# Altium PCB DS135-1.1-A浊度传感器.PcbDoc
Units mm, origin at the board's own origin, x right, y up, seen from the top; angles counter-clockwise.
Board outline 42 x 93 mm, 2 copper layers (Top Layer, Bottom Layer), stack 1.581 mm thick; 48 components, 48 nets, 195 pads, 53 vias.
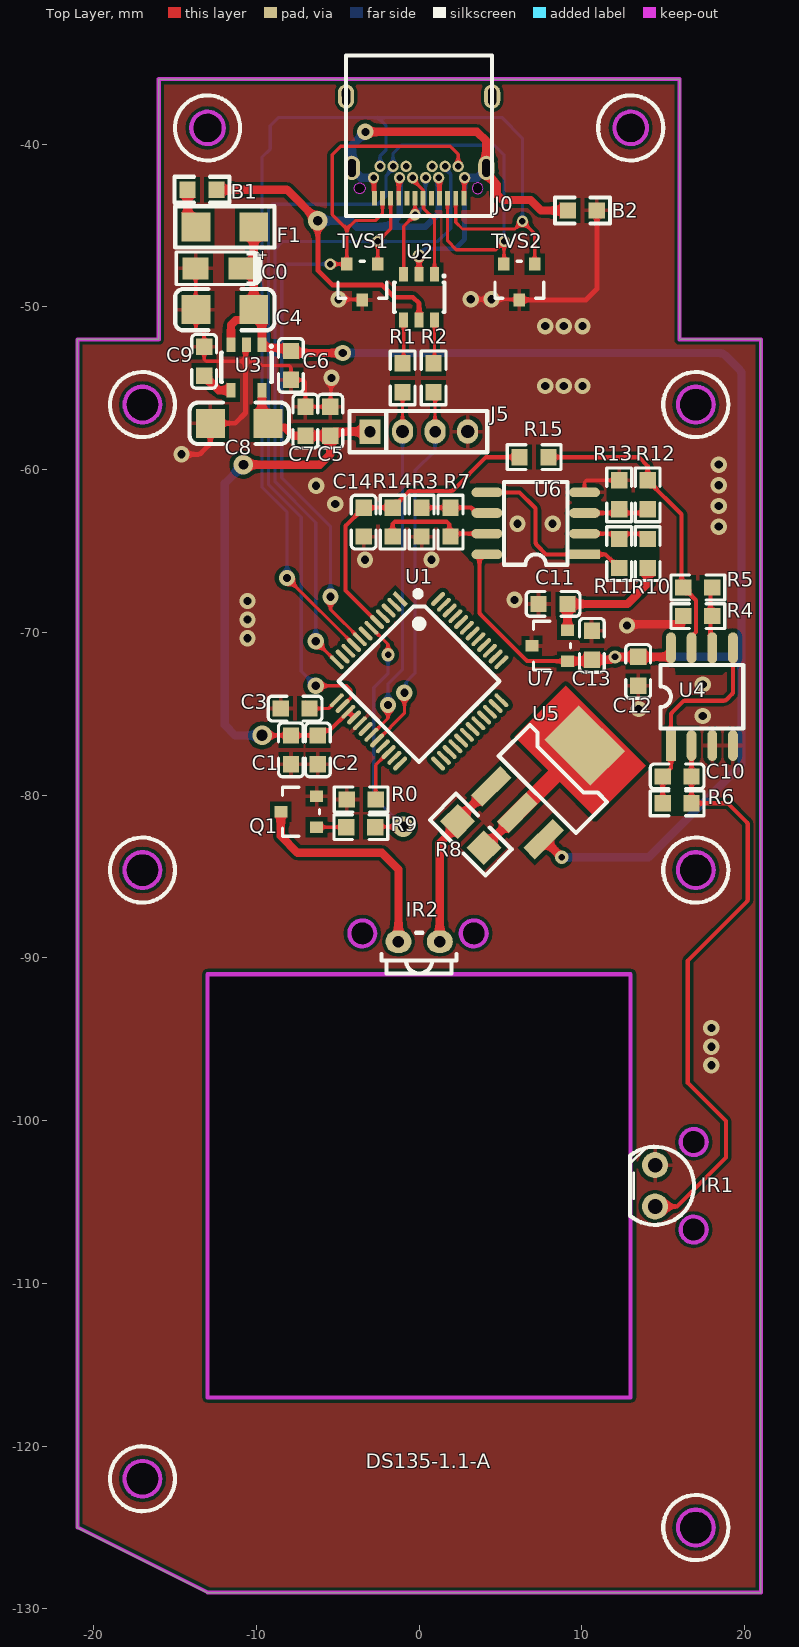
[diagram p0: Top Layer view]
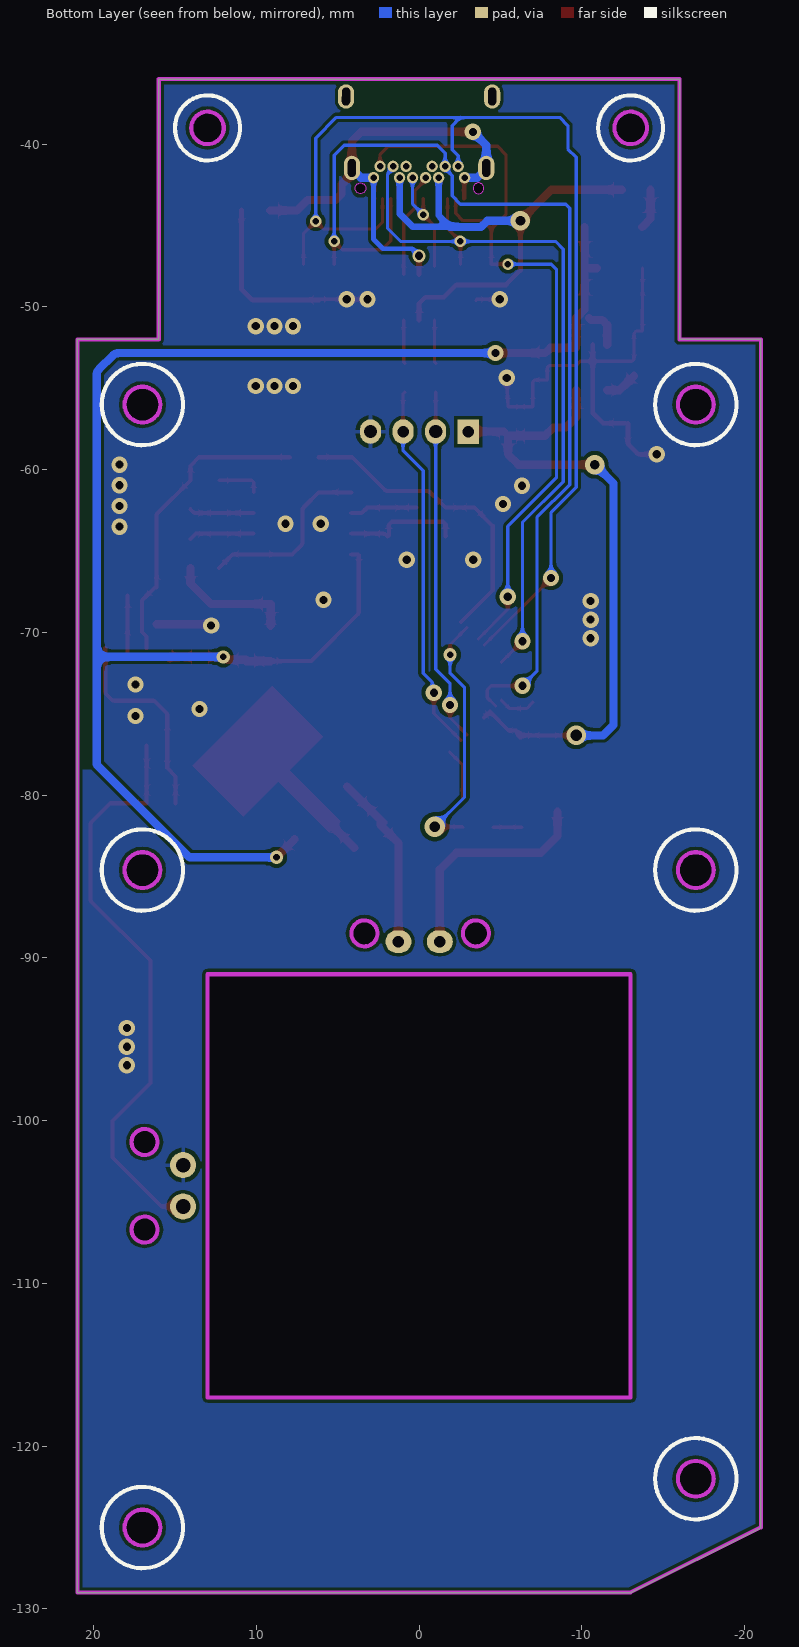
[diagram p1: Bottom Layer view, seen from below]
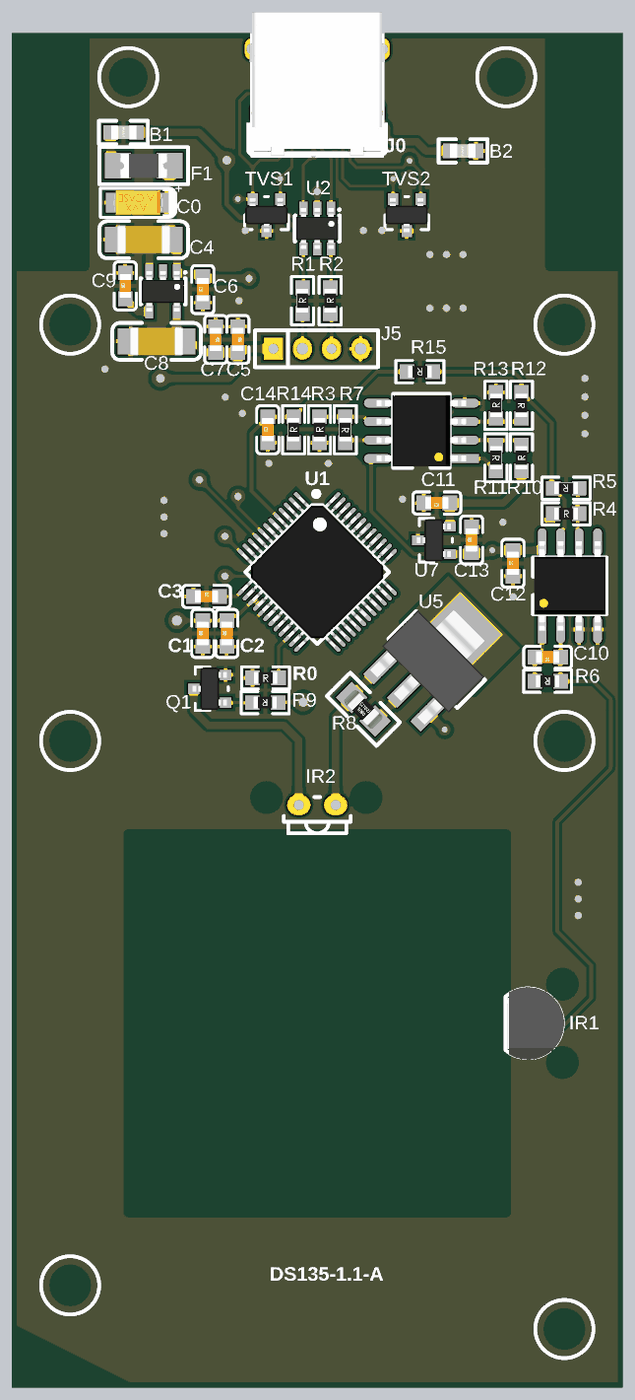
[diagram p2: 3D render of the assembled board from above, using the file's embedded part models]

## Layer stack, top to bottom
Top Solder: solder mask 0.0102, Solder Resist, Dk 3.5
Top Layer: signal copper 0.0356
Dielectric 1: dielectric 1.51, FR-4, Dk 4.8
Bottom Layer: signal copper 0.0356
Bottom Solder: solder mask 0.0102, Solder Resist, Dk 3.5

## Board outline
-21,-125 -13,-129 21,-129 21,-52 16,-52 16,-36 -16,-36 -16,-52 -21,-52
cut-out: 16.07,-101.31 ccw(c16.87,-101.31) 16.87,-102.11 ccw(c16.87,-101.31) 17.67,-101.31 ccw(c16.87,-101.31) 16.87,-100.51 ccw(c16.87,-101.31)
cut-out: 16.07,-106.69 cw(c16.87,-106.69) 16.87,-105.89 cw(c16.87,-106.69) 17.67,-106.69 cw(c16.87,-106.69) 16.87,-107.49 cw(c16.87,-106.69)
cut-out: 2.56,-88.49 ccw(c3.36,-88.49) 3.36,-89.29 ccw(c3.36,-88.49) 4.16,-88.49 ccw(c3.36,-88.49) 3.36,-87.69 ccw(c3.36,-88.49)
cut-out: -4.29,-88.49 ccw(c-3.49,-88.49) -3.49,-89.29 ccw(c-3.49,-88.49) -2.69,-88.49 ccw(c-3.49,-88.49) -3.49,-87.69 ccw(c-3.49,-88.49)
cut-out: 15.9,-84.6 ccw(c17,-84.6) 17,-85.7 ccw(c17,-84.6) 18.1,-84.6 ccw(c17,-84.6) 17,-83.5 ccw(c17,-84.6)
cut-out: 12,-39 ccw(c13,-39) 13,-40 ccw(c13,-39) 14,-39 ccw(c13,-39) 13,-38 ccw(c13,-39)
cut-out: -13,-40 ccw(c-13,-39) -12,-39 ccw(c-13,-39) -13,-38 ccw(c-13,-39) -14,-39 ccw(c-13,-39)
cut-out: -18.1,-122 ccw(c-17,-122) -17,-123.1 ccw(c-17,-122) -15.9,-122 ccw(c-17,-122) -17,-120.9 ccw(c-17,-122)
cut-out: 15.9,-125 ccw(c17,-125) 17,-126.1 ccw(c17,-125) 18.1,-125 ccw(c17,-125) 17,-123.9 ccw(c17,-125)
cut-out: -18.1,-84.6 ccw(c-17,-84.6) -17,-85.7 ccw(c-17,-84.6) -15.9,-84.6 ccw(c-17,-84.6) -17,-83.5 ccw(c-17,-84.6)
cut-out: 18.1,-56 ccw(c17,-56) 17,-54.9 ccw(c17,-56) 15.9,-56 ccw(c17,-56) 17,-57.1 ccw(c17,-56)
cut-out: -18.1,-56 cw(c-17,-56) -17,-54.9 cw(c-17,-56) -15.9,-56 cw(c-17,-56) -17,-57.1 cw(c-17,-56)
cut-out: -13,-117 -13,-91 13,-91 13,-117

## Design rules (kind name [scope] priority, off if disabled: settings)
Clearance [All] p1: gap=0.254 ignorepadtopadclearanceinfootprint=TRUE except(0: Arc-Hole Track-Hole SMDPad-Hole THPad-Hole Via-Hole Fill-Hole Poly-Hole Region-Hole Text-Hole; 0.12: THPad-THPad; 0.15: Arc-SMDPad Arc-THPad Track-SMDPad Track-THPad SMDPad-SMDPad; 0.2: Arc-Arc Arc-Track Arc-Via Arc-Fill Arc-Poly Arc-Region Arc-Text Track-Track Track-Via Track-Fill Track-Poly Track-Region Track-Text SMDPad-THPad SMDPad-Text THPad-Fill THPad-Poly THPad-Region)
MinimumSolderMaskSliver [All] p1: minsoldermaskwidth=0.102
PolygonConnect GND [All] p1: thpad.connectstyle=Relief thpad.reliefconductorwidth=0.254 thpad.reliefentries=4 thpad.polygonreliefangle="90 Angle" thpad.airgapwidth=0.254 smdpad.connectstyle=Relief smdpad.reliefconductorwidth=0.254 smdpad.reliefentries=4 smdpad.polygonreliefangle="90 Angle" smdpad.airgapwidth=0.254 via.connectstyle=Direct via.reliefconductorwidth=0.254 via.reliefentries=4 via.polygonreliefangle="90 Angle" via.airgapwidth=0.254
PolygonConnect VSS [InNet('VSS') vs InNet('VSS')] p2: thpad.connectstyle=Relief thpad.reliefconductorwidth=0.508 thpad.reliefentries=4 thpad.polygonreliefangle="90 Angle" thpad.airgapwidth=0.254 smdpad.connectstyle=Relief smdpad.reliefconductorwidth=0.508 smdpad.reliefentries=4 smdpad.polygonreliefangle="90 Angle" smdpad.airgapwidth=0.254 via.connectstyle=Direct via.reliefconductorwidth=0.508 via.reliefentries=4 via.polygonreliefangle="90 Angle" via.airgapwidth=0.254
RoutingVias [All] p1: holewidth=0.6 width=1 viastyle="Through Hole" minholewidth=0.4 minwidth=0.8 maxholewidth=1 maxwidth=2
SilkToSilkClearance [All] p1: silktosilkclearance=0.025
SilkToSolderMaskClearance [IsPad] p1: minsilkscreentomaskgap=0.025 clearancetoexposedcopper=TRUE
SolderMaskExpansion [All] p1: expansion=0.102 istentingtop=FALSE
Width [All] p1: maxlimit=1 minlimit=0.2 preferedwidth=0.2
27 further rules are at their usual default settings.

## Classes and differential pairs
net class R15_Nets: ADC0 SIG
net class U7_Nets: 2V5 GND VCC_5V
net class U6_Nets: GND NetR3_2 NetR7_2 NetR10_2 NetR11_2 NetR12_2 VCC_5V
net class R14_Nets: ADC0 NetR7_2 NetR14_1
net class R13_Nets: GND NetR12_2
net class R12_Nets: NetR12_2 SIG
net class R11_Nets: NetR10_2 NetR11_2
net class R10_Nets: 2V5 NetR10_2
net class R3_Nets: GND NetR3_2
net class C13_Nets: GND VCC_5V
net class C11_Nets: 2V5 GND
net class C12_Nets: GND VCC_5V
net class U3_Nets: GND NetC9_1 VCC_3V3_MCU VCC_5V
net class C10_Nets: NetC10_1 NetC10_2
net class C0_Nets: GND VCC_5V
net class R8_Nets: NetIR2_1 NetR8_1
net class U1_Nets: ADC0 ADC1 DAC_OUT Dis1_red_EN Dis2_green_EN Dis3_blue_EN GND I2C1_SCL I2C1_SDA KEY_HOME NetU4_1 NetU4_2 NetU4_3 NetU4_4 NetU4_7 NetU4_11 NetU4_23 NetU4_24 NetU4_25 NetU4_26 NetU4_30 NetU4_32 NetU4_39 NetU4_40 NetU4_41 NetU4_42 NetU4_43 NetU4_44 NetU4_45 NetU4_46 NetU4_47 NetU4_48 P3.0/D-/RxD P3.1/D+/TxD P3.3 PWM SPI1/SPI2_CS SPI1_MISO SPI1_MOSI SPI1_SCK SPI2_MISO SPI2_MOSI SPI2_SCK UCAP USART2_RXD USART2_TXD VCC_3V3_MCU
net class U4_Nets: GND NetC10_1 NetC10_2 NetR4_2 SIG VCC_5V
net class J5_Nets: GND P3.0/D-/RxD P3.1/D+/TxD VCC_3V3_MCU
net class C8_Nets: GND VCC_3V3_MCU
net class C2_Nets: GND VCC_3V3_MCU
net class R9_Nets: ADC1 NetQ1_1
net class R7_Nets: NetR3_2 NetR7_2
net class IR2_Nets: NetIR2_1 NetIR2_2
net class IR1_Nets: GND NetC10_1
net class TVS2_Nets: GND SPI1/SPI2_CS SPI1_SCK
net class J0_Nets: D+_I/O1 D-_I/O2 NetJ0_A5 NetJ0_A8 NetJ0_B5 NetJ0_B8 SPI1/SPI2_CS SPI1_MISO SPI1_MOSI SPI1_SCK VBUS VSS
net class F1_Nets: NetB1_2 VCC_5V
net class C7_Nets: GND VCC_3V3_MCU
net class C4_Nets: GND VCC_5V
net class B2_Nets: GND VSS
net class B1_Nets: NetB1_2 VBUS
net class U5_Nets: NetIR2_1 NetR8_1 VCC_5V
net class R4_Nets: GND NetR4_2
net class R6_Nets: NetC10_1 NetC10_2
net class R2_Nets: P3.1/D+/TxD USB_D+
net class R1_Nets: P3.0/D-/RxD USB_D-
net class R5_Nets: NetR4_2 SIG
net class R0_Nets: GND P3.3
net class Q1_Nets: GND NetIR2_2 NetQ1_1
net class U2_Nets: D+_I/O1 D-_I/O2 USB_D+ USB_D- VBUS VSS
net class TVS1_Nets: GND SPI1_MISO SPI1_MOSI
net class C9_Nets: GND NetC9_1
net class C3_Nets: GND UCAP
net class C1_Nets: GND VCC_3V3_MCU
net class C5_Nets: GND VCC_3V3_MCU
net class C14_Nets: ADC0 GND
net class C6_Nets: GND VCC_5V

## Components (designator, comment, footprint, x,y, rotation, side; value= is the part's Value field where it differs from the comment)
B1 "CBM160808U102" 0603Bead -13.335,-42.799 r180 top
B2 "CBM160808U102" 0603Bead 10.033,-44.069 r0 top
C0 "AVX_10uF/16V ±10％(C106)" AVX_3216-18(1206)_SMD -12.319,-47.625 r180 top value=10uF
C1 "SMDCAP00013" 0603CAP -7.874,-77.217 r90 top locked value=100nF
C2 "SMDCAP00012" 0603CAP -6.223,-77.217 r90 top locked value=4.7uF
C3 "SMDCAP00015" 0603CAP -7.62,-74.676 r0 top locked value=1uF
C4 "MLCC 10uF 50V ±20％ 1206" 1206CAP -11.938,-50.165 r0 top value=10uF
C5 "SMDCAP00013" 0603CAP -5.461,-57.022 r270 top value=100nF
C6 "SMDCAP00015" 0603CAP -7.874,-53.593 r90 top value=1uF
C7 "SMDCAP00015" 0603CAP -6.985,-57.022 r270 top value=1uF
C8 "MLCC 10uF 50V ±20％ 1206" 1206CAP -11.049,-57.149 r0 top value=10uF
C9 "SMDCAP00010" 0603CAP -13.208,-53.34 r90 top value=10nF
C10 "SMDCAP00008" 0603CAP 15.853,-78.847 r180 top value=1nF
C11 "SMDCAP00013" 0603CAP 8.23,-68.25 r180 top value=100nF
C12 "SMDCAP00013" 0603CAP 13.462,-72.391 r90 top value=100nF
C13 "SMDCAP00013" 0603CAP 10.617,-70.791 r90 top value=100nF
C14 "SMDCAP00013" 0603CAP -3.404,-63.221 r90 top value=100nF
F1 "SMD1206-050C-16V" 1206FUSE -11.938,-45.085 r0 top value="16V /0.5A"
IR1 "PD438C/S46" PD438C/S46 14.5,-104 r270 top locked
IR2 "IR928-6C-F" IR928-6C-F 0,-89 r0 top locked
J0 "USB_Type_C_24P" USB_TYPE_C_24P_Receptacle 0,-40.2 r180 top locked
J5 "DIP4单排直针  间距2mm 针长11mm 铜" H4 -3.016,-57.658 r0 top value=4P
Q1 "SMDNPN00001" SOT23 -7.399,-81.016 r90 top value=SS8050
R0 "Chip 0R 1/16W ±1％ 0603" 0603RES -3.556,-80.264 r0 top locked value=0R
R1 "Chip 22R 1/16W ±1％ 0603" 0603RES -1.016,-54.356 r90 top value=22R
R2 "Chip 22R 1/16W ±1％ 0603" 0603RES 0.889,-54.356 r90 top value=22R
R3 "SMDRES00056" 0603RES 0.152,-63.221 r90 top value="1K ±0.1%"
R4 "Chip 1K 1/16W ±0.1％ 0603" 0603RES 17.123,-68.992 r0 top value="1K ±0.1%"
R5 "Chip 15K 1/16W ±0.1％ 0603" 0603RES 17.123,-67.239 r180 top value="12.4K ±0.1%"
R6 "Chip 120K 1/16W  ±0.1% 0603" 0603RES 15.853,-80.498 r180 top value="120K ±0.1%"
R7 "SMDRES00056" 0603RES 1.93,-63.221 r270 top value="6.2K ±0.1%"
R8 "SMDRES00011" 0805RES 3.175,-82.423 r135 top value=51R
R9 "SMDRES00056" 0603RES -3.581,-81.966 r180 top value=10K
R10 "SMDRES00056" 0603RES 14.046,-65.151 r90 top value="10K ±0.1%"
R11 "SMDRES00056" 0603RES 12.294,-65.151 r270 top value="10K ±0.1%"
R12 "SMDRES00056" 0603RES 14.046,-61.544 r270 top value="10K ±0.1%"
R13 "SMDRES00056" 0603RES 12.294,-61.544 r90 top value="10K ±0.1%"
R14 "SMDRES00034" 0603RES -1.626,-63.221 r90 top value=1K
R15 "Chip 0R 1/16W ±1％ 0603" 0603RES 7.061,-59.233 r180 top value=0R
TVS1 "MMBZ9V1A" SOT23 -3.49,-48.471 r180 top
TVS2 "MMBZ9V1A" SOT23 6.157,-48.471 r180 top
U1 "STC32G12K128_35I LQFP48" LQFP-48 0,-73 r315 top locked value=STC32G12K128
U2 "82400102" SOT23-6 0,-49.4 r180 top
U3 "ME6211C33M5G-N" SOT23-5 -10.607,-53.717 r180 top
U4 "OPA2188" SO-8 17.377,-73.945 r90 top
U5 "AMS1117-ADJ" SOT223 10.175,-76.947 r225 top
U6 "OPA2188" SO-8 7.166,-63.297 r180 top
U7 "REF3025" SOT23 8.026,-70.815 r90 top value=丝印R30C

## Footprints (in the part's own frame and the unit in brackets; to place one, negate y for a bottom-side part, rotate by r counter-clockwise, add the part's x,y. Pads: shape width x height; smd on the part's side, far side on the other; paste and mask are expansions set on the pad)
0603Bead [mm]
  rect 1x1 smd: 1(-0.889,0) 2(0.889,0)
  silkscreen extent -1.69,-0.8 1.69,0.8, body extent -0.9,-0.48 0.85,0.48, height 0.95
0603CAP [mm]
  rect 1x1 smd: 1(-0.889,0) 2(0.89,0)
  silkscreen extent -1.65,-0.76 1.65,0.76, body extent -0.8,-0.4 0.8,0.4, height 0.3
0603RES [mm]
  rect 1x1 smd: 1(-0.889,0) 2(0.889,0)
  silkscreen extent -1.65,-0.76 1.65,0.76, body extent -0.8,-0.41 0.8,0.41, height 0.51
0805RES [mil]
  rect 60x60 smd: 1(-45,0) 2(45,0)
  silkscreen extent -95,-45 95,45, body extent -55,-25 55,25, height 32
1206CAP [mil]
  rect 70x70 smd: 1(-70,0) 2(70,0)
  silkscreen extent -120,-50 120,50, body extent -73,-38 73,38, height 47
1206FUSE [mil]
  rect 70x70 smd: 1(-70,0) 2(70,0)
  silkscreen extent -120,-50 120,50, body extent -63,-33 63,33, height 57
AVX_3216-18(1206)_SMD [mm]
  rect 1.6x1.35 smd: 1(-1.41,0) 2(1.41,0)
  silkscreen extent -2.6,-1 2.6,1, body extent -1.7,-0.84 1.7,0.84, height 1.71
H4 [mm]
  rect 1.3x1.5 hole 0.7: 1(0,0)
  oval 1.3x1.5 hole 0.813: 2(2,0) 4(6,0)
  oval 1.3x1.5 hole 0.7: 3(4,0)
  silkscreen extent -1.27,-1.27 7.2,1.27
IR928-6C-F [mm]
  oval 1.6x1.4 hole 0.7: 1(1.27,0) 2(-1.27,0)
  silkscreen extent -2.3,-1.95 2.3,0.55, body extent -2.3,-1.69 2.3,0.81, height 8.54
LQFP-48 [mm]
  rect 1.1x0.27 smd mask+0.08: 1(-4.4,2.75)
  oval 1.1x0.27 smd mask+0.08: 2(-4.4,2.25) 3(-4.4,1.75) 4(-4.4,1.25) 5(-4.4,0.75) 6(-4.4,0.25) 7(-4.4,-0.25) 8(-4.4,-0.75) 9(-4.4,-1.25) 10(-4.4,-1.75) 11(-4.4,-2.25) 12(-4.4,-2.75) 25(4.4,-2.75) 26(4.4,-2.25) 27(4.4,-1.75) 28(4.4,-1.25) 29(4.4,-0.75) 30(4.4,-0.25) 31(4.4,0.25) 32(4.4,0.75) 33(4.4,1.25) 34(4.4,1.75) 35(4.4,2.25) 36(4.4,2.75)
  oval 0.27x1.1 smd mask+0.08: 13(-2.75,-4.4) 14(-2.25,-4.4) 15(-1.75,-4.4) 16(-1.25,-4.4) 17(-0.75,-4.4) 18(-0.25,-4.4) 19(0.25,-4.4) 20(0.75,-4.4) 21(1.25,-4.4) 22(1.75,-4.4) 23(2.25,-4.4) 24(2.75,-4.4) 37(2.75,4.4) 38(2.25,4.4) 39(1.75,4.4) 40(1.25,4.4) 41(0.75,4.4) 42(0.25,4.4) 43(-0.25,4.4) 44(-0.75,4.4) 45(-1.25,4.4) 46(-1.75,4.4) 47(-2.25,4.4) 48(-2.75,4.4)
  silkscreen extent -3.95,-3.5 3.5,3.85, body extent -4.51,-4.5 4.5,4.5, height 1.54
PD438C/S46 [mm]
  round 1.6 hole 0.9: 1(-1.27,0) 2(1.27,0)
  silkscreen extent -2.4,-1.54 2.4,2.4, body extent -2.5,-1.4 2.5,2.5, height 9.6
SO-8 [mm]
  rect 1.9x0.6 smd: 1(-3,1.905)
  oval 1.9x0.6 smd: 2(-3,0.635) 3(-3,-0.635) 4(-3,-1.905) 5(3,-1.905) 6(3,-0.635) 7(3,0.635) 8(3,1.905)
  silkscreen extent -1.95,-2.54 1.95,2.54, body extent -3.07,-2.44 3.07,2.44, height 1.77
SOT23 [mm]
  rect 0.7x0.8 smd: 1(-0.95,-1.1) 2(0.95,-1.1) 3(0,1.1)
  silkscreen extent -1.5,-1.27 1.5,1, body extent -1.46,-1.17 1.46,1.17, height 1
SOT23-5 [mm] "SOT-23/SC-74A; 5 Leads; Body 3.1 x 3 mm, inc. leads (LxW max)"
  rect 0.55x0.9 smd: 1(-0.95,-1.4) 2(0,-1.4) 3(0.95,-1.4) 4(0.95,1.4) 5(-0.95,1.4)
  silkscreen extent -1.59,-1.36 1.55,0.9, body extent -1.45,-1.4 1.45,1.4, height 1.45
SOT23-6 [mm] "SOT-23/SC-74A; 5 Leads; Body 3.1 x 3 mm, inc. leads (LxW max)"
  rect 0.55x0.9 smd: 1(-0.95,-1.4) 2(0,-1.4) 3(0.95,-1.4) 4(0.95,1.4) 5(0,1.4) 6(-0.95,1.4)
  silkscreen extent -1.59,-1.36 1.55,0.9, body extent -1.45,-1.4 1.45,1.4, height 1.45
SOT223 [mm]
  rect 2.54x1 smd: 1(5.842,-2.286) 2(5.842,0) 3(5.842,2.286)
  rect 3x4 smd: 2(0,0)
  silkscreen extent 1.48,-3.28 4.19,3.42, body extent -0.4,-3.25 6.6,3.25, height 1.65
USB_TYPE_C_24P_Receptacle [mm]
  oval 1x1.5 hole 0.5 slot 1.1 at 90.5 deg: 0(-4.49,-3.13) 0(-4.13,1.26) 0(4.13,1.26) 0(4.49,-3.13)
  rect 0.3x0.9 smd mask+0.1: A1(-2.75,3.13) A2(-2.25,3.13) A3(-1.75,3.13) A4(-1.25,3.13) A5(-0.75,3.13) A6(-0.25,3.13) A7(0.25,3.13) A8(0.75,3.13) A9(1.25,3.13) A10(1.75,3.13) A11(2.25,3.13) A12(2.75,3.13)
  round 0.7 hole 0.4: B1(2.8,1.86) B2(2.4,1.16) B3(1.6,1.16) B4(1.2,1.86) B5(0.8,1.16) B6(0.4,1.86) B7(-0.4,1.86) B8(-0.8,1.16) B9(-1.2,1.86) B10(-1.6,1.16) B11(-2.4,1.16) B12(-2.8,1.86)
  Keep-Out Layer board cut-out: 3.98,2.51 3.955,2.384 3.883,2.277 3.776,2.205 3.65,2.18 3.65,2.18 3.524,2.205 3.417,2.277 3.345,2.384 3.32,2.51 3.32,2.51 3.345,2.636 3.417,2.743 3.524,2.815 3.65,2.84 3.65,2.84 3.776,2.815 3.883,2.743 3.955,2.636 3.98,2.51
  Keep-Out Layer board cut-out: -3.93,2.51 -3.905,2.384 -3.833,2.277 -3.726,2.205 -3.6,2.18 -3.6,2.18 -3.474,2.205 -3.367,2.277 -3.295,2.384 -3.27,2.51 -3.27,2.51 -3.295,2.636 -3.367,2.743 -3.474,2.815 -3.6,2.84 -3.6,2.84 -3.726,2.815 -3.833,2.743 -3.905,2.636 -3.93,2.51
  silkscreen extent -4.48,-5.66 4.48,4.21, body extent -4.87,-5.66 4.88,4.21, height 3.36

## Part data
B1 B2: library part "Chip Ferrite Bead 0606", "贴片磁珠"
C0: "钽电容"
C1 C5 C11 C12 C13 C14: library part "MLCC 100nF 50V ±10％ 0603", "贴片电容"
C2: library part "MLCC 4.7uF 50V ±10％ 0603", "贴片电容"
C3 C6 C7: library part "MLCC 1uF 50V ±10％ 0603", "贴片电容"
C4 C8: "贴片电容"
C9: library part "MLCC 10nF 50V ±10％ 0603", "贴片电容"
C10: library part "MLCC 1nF 50V ±10％ 0603", "贴片电容"
F1: "贴片自恢复保险丝 16V /0.5A"
J5: "单排直针"
Q1: library part "SS8050 Y1 SOT-23", "贴片三极管"
R0 R1 R2 R15: "贴片电阻"
R3 R5 R7 R9 R10 R11 R12 R13: library part "Chip 10K 1/16W ±1％ 0603", "贴片电阻"
R4 R14: library part "Chip 1K 1/16W ±1％ 0603", "贴片电阻"
R6: library part "Chip 120K 1/16W ±1％ 0603", "贴片电阻"
R8: library part "Chip 51R 1/10W ±1％ 0805", "贴片电阻"
TVS1 TVS2: library part TVS, "瞬态抑制二极管"
U1: "单片机芯片"
U2: "瞬态抑制二极管(TVS)"
U3 U5: "稳压芯片"
U4 U6: library part TL062C

## Via types
v1: diameter 1, hole 0.5, Top Layer to Bottom Layer, tented both sides, 40 vias
v2: diameter 0.7, hole 0.4, Top Layer to Bottom Layer, tented both sides, 5 vias
v3: diameter 0.813, hole 0.406, Top Layer to Bottom Layer, tented both sides, 3 vias
v4: diameter 1.2, hole 0.6, Top Layer to Bottom Layer, tented both sides, 2 vias
v5: diameter 1.27, hole 0.635, Top Layer to Bottom Layer, tented both sides, 1 vias
v6: diameter 1.2, hole 0.7, Top Layer to Bottom Layer, tented both sides, 1 vias
v7: diameter 0.8, hole 0.5, Top Layer to Bottom Layer, tented both sides, 1 vias

## Nets (pads, with @x,y where several pads share a name; then routed paths per layer and width w, separated by ;. In a path a pad name is that pad's centre, name@x,y a point inside that pad or via, vN(x,y) a via of type N, cw(c..) or ccw(c..) an arc to the next point about the centre after c; other vN are vias at no path point)
2V5: C11.1 R10.1 U7.2 | length 7.7
  Top Layer w0.508: U7.2@9.126,-69.586 9.119,-69.578 C11.1 12.802,-68.25 14.046,-67.005 R10.1
ADC0: C14.2 R14.2 R15.2 U1.5 | length 19.1
  Top Layer w0.254: U1.5 -4.521,-67.418 -4.521,-63.448 C14.2 -1.625,-62.331 -1.253,-61.959 -1.253,-61.957 -0.686,-61.39 cw(c-0.506,-61.57) -0.506,-61.316 1.927,-61.316 ccw(c1.927,-61.062) 2.106,-61.241 4.115,-59.233 R15.2
ADC1: R9.1 U1.6 | length 15.5
  Top Layer w0.2: U1.6 -1.905,-70.741 v3(-1.905,-71.374) ; R9.1 -2.667,-81.94 v5(-0.965,-81.94)
  Bottom Layer w0.2: v3(-1.905,-71.374) -1.905,-72.517 -2.794,-73.406 -2.794,-80.112 v5(-0.965,-81.94)
D+_I/O1: J0.A6 J0.B6 U2.1 | length 6.5
  Top Layer w0.2: J0.B6 -0.4,-42.179 0.25,-42.829 J0.A6 0.266,-43.346 0.266,-43.93 0.95,-44.613 U2.1
D-_I/O2: J0.A7 J0.B7 U2.3 | length 7
  Top Layer w0.2: -0.95,-47.498 -0.95,-45.032 v2(-0.25,-44.332) J0.A7
  Bottom Layer w0.2: v2(-0.25,-44.332) 0.4,-43.682 J0.B7
DAC_OUT: U1.10
Dis1_red_EN: U1.35
Dis2_green_EN: U1.34
Dis3_blue_EN: U1.36
GND: B2.2 C0.2 C1.1 C2.1 C3.1 C4.1 C5.1 C6.1 C7.1 C8.1 C9.2 C11.2 C12.1 C13.2 C14.1 IR1.1 J5.4 Q1.2 R0.1 R3.1 R4.1 R13.2 TVS1.3 TVS2.3 U1.17 U3.2 U4.3 U4.4 U6.4 U7.3 | length 48.4
  Top Layer w0.2: C0.2 -13.729,-50.152 C4.1 -13.716,-51.486 -13.325,-51.486 -13.208,-51.603 C9.2 -13.208,-53.14 ccw(c-13.008,-53.14) -13.008,-53.34 -10.668,-53.34 -9.906,-53.34 -9.711,-53.535 ccw(c-9.569,-53.394) -9.569,-53.594 -8.074,-53.594 cw(c-8.074,-53.794) -7.874,-53.794 C6.1 -7.185,-54.482 cw(c-7.185,-54.682) -6.985,-54.682 C7.1 C5.1 -5.444,-55.733 cw(c-5.244,-55.733) -5.444,-55.726 v1(-5.385,-54.356) ; v1(-4.953,-49.53) -3.531,-49.53 TVS1.3 TVS1.3@-3.49,-49.621 ; v1(3.175,-49.53) v1(4.445,-49.53) 6.116,-49.53 TVS2.3 ; U6.4 10.166,-60.772 10.283,-60.655 R13.2
  Top Layer w0.3: v1(-14.605,-59.055) -13.587,-59.055 ccw(c-13.587,-58.755) -13.376,-58.968 -12.914,-58.506 ccw(c-13.127,-58.295) -12.827,-58.295 C8.1 ; C8.1@-12.7,-57.15 -11.303,-57.15 -10.668,-56.515 -10.668,-53.34 U3.2@-10.668,-52.317 ; TVS2.3 10.246,-49.571 10.922,-48.895 B2.2 B2.2@10.905,-44.052
  Top Layer w0.508: v1(12.776,-69.571) 12.852,-69.494 16.129,-69.494
  other v1: 17.958,-96.596 17.958,-95.453 17.958,-94.31 17.424,-75.133 13.487,-74.701 17.424,-73.203 -10.541,-70.358 -10.541,-69.215 -10.541,-68.072 5.867,-67.996 -3.327,-65.532 0.762,-65.532 18.415,-63.5 6.045,-63.322 8.204,-63.322 18.415,-62.23 -5.156,-62.103 -6.325,-60.985 18.415,-60.96 18.415,-59.69 7.747,-54.864 8.89,-54.864 10.033,-54.864 7.747,-51.181 8.89,-51.181 10.033,-51.181
I2C1_SCL: U1.38
I2C1_SDA: U1.37
KEY_HOME: U1.21
NetB1_2: B1.2 F1.1 | length 2.5
  Top Layer w0.508: B1.2 -14.224,-44.577 F1.1
NetC9_1: C9.1 U3.4 | length 2
  Top Layer w0.508: C9.1 -12.32,-55.117 U3.4
NetC10_1: C10.1 IR1.2 R6.1 U4.2 | length 36.1
  Top Layer w0.254: IR1.2 15.837,-105.27 18.847,-102.26 18.847,-100.025 16.51,-97.688 16.51,-90.17 20.119,-86.561 ccw(c19.939,-86.382) 20.193,-86.382 20.193,-81.817 ccw(c19.939,-81.817) 20.119,-81.637 18.979,-80.498 R6.1 C10.1 U4.2
NetC10_2: C10.2 R6.2 U4.1 U4.5 | length 12.8
  Top Layer w0.254: R6.2 14.964,-78.848 C10.2 15.472,-78.338 U4.1 15.472,-75.088 cw(c15.726,-75.088) 15.546,-74.909 16.187,-74.268 cw(c16.367,-74.447) 16.367,-74.193 18.722,-74.193 ccw(c18.722,-73.939) 18.901,-74.119 19.207,-73.813 ccw(c19.028,-73.633) 19.282,-73.633 U4.5
NetIR2_1: IR2.1 R8.2 U5.1 | length 11
  Top Layer w0.508: IR2.1 1.27,-82.931 2.367,-81.834 R8.2 ; R8.2@2.211,-81.678 U5.1
NetIR2_2: IR2.2 Q1.3 | length 14
  Top Layer w0.508: Q1.3 -8.499,-82.509 -7.468,-83.541 -2.286,-83.541 -1.27,-84.557 IR2.2
NetQ1_1: Q1.1 R9.2 | length 1.7
  Top Layer w0.2: Q1.1 R9.2@-4.562,-81.966
NetR3_2: R3.2 R7.1 U6.6 | length 4.1
  Top Layer w0.254: R3.2 R7.1 3.194,-62.332 3.524,-62.662 U6.6
NetR4_2: R4.2 R5.1 U4.6 | length 3.8
  Top Layer w0.254: U4.6@17.907,-71.549 17.907,-69.494 17.907,-67.742
NetR7_2: R7.2 R14.1 U6.7 | length 7.5
  Top Layer w0.254: R14.1@-1.651,-64.084 R14.1 -1.626,-63.344 -1.477,-63.195 1.676,-63.195 1.859,-63.377 1.859,-64.038 R7.2 2.034,-64.006 cw(c2.213,-64.186) 2.213,-63.932 U6.7
NetR8_1: R8.1 U5.2 | length 3
  Top Layer w0.508: R8.1 6.044,-81.17 U5.2@6.044,-81.078
NetR10_2: R10.2 R11.1 U6.2 | length 4
  Top Layer w0.254: U6.2 13.716,-63.932 R10.2
NetR11_2: R11.2 U6.1 U6.5 | length 11.3
  Top Layer w0.254: U6.5 6.172,-61.392 7.088,-62.308 cw(c6.909,-62.488) 7.163,-62.488 7.163,-64.462 ccw(c7.417,-64.462) 7.237,-64.641 7.798,-65.202 U6.1 11.455,-65.202 R11.2
NetR12_2: R12.2 R13.1 U6.3 | length 4
  Top Layer w0.254: U6.3 13.818,-62.662 R12.2
P3.0/D-/RxD: J5.2 R1.1 U1.19 | length 21.8
  Top Layer w0.2: U1.19 -1.905,-75.259 v1(-1.905,-74.459) ; J5.2 R1.1
  Bottom Layer w0.2: v1(-1.905,-74.459) -1.905,-73.152 -1.016,-72.263 J5.2
P3.1/D+/TxD: J5.3 R2.1 U1.20 | length 22.9
  Top Layer w0.2: U1.20 -0.905,-74.965 v1(-0.905,-73.703) ; R2.1 0.984,-55.34 J5.3
  Bottom Layer w0.2: v1(-0.905,-73.703) -0.807,-73.605 -0.807,-73.07 -0.254,-72.517 -0.254,-60.071 0.984,-58.833 J5.3
P3.3: R0.2 U1.22 | length 3.2
  Top Layer w0.2: R0.2 -2.667,-78.142 U1.22
PWM: U1.33
SIG: R5.2 R12.1 R15.1 U4.7 | length 18.8
  Top Layer w0.254: R15.1 13.513,-59.233 14.046,-59.766 R12.1 16.129,-62.738 R5.2@16.129,-67.239 ; R5.2 17.018,-68.024 17.018,-69.973 16.742,-70.249 U4.7
SPI1/SPI2_CS: J0.A3 J0.B3 TVS2.2 U1.14 | length 64.7
  Top Layer w0.2: v1(-6.35,-73.279) -4.445,-73.279 -4.191,-73.533 -4.191,-74.009 U1.14 ; J0.A3 1.75,-45.946 2.286,-46.482 4.713,-46.482 v2(5.221,-45.974) 5.221,-47.357 TVS2.2
  Bottom Layer w0.2: v1(-6.35,-73.279) -7.239,-72.39 -7.239,-62.934 -9.252,-60.921 -9.252,-43.923 -9.017,-43.688 -2.54,-43.688 -2.032,-43.18 -2.032,-41.927 J0.B3@-1.6,-41.495 ; J0.B3 -1.6,-40.551 -1.11,-40.061 4.605,-40.061 5.221,-40.677 v2(5.221,-45.974)
SPI1_MISO: J0.A11 J0.B11 TVS1.2 U1.8 | length 48.3
  Top Layer w0.2: v2(-5.461,-47.371) TVS1.2 -4.44,-45.217 ; v1(-5.446,-67.803) -5.446,-68.585 U1.8@-3.627,-70.404 ; J0.A11 -2.25,-44.249 -2.694,-44.693 -3.916,-44.693 -4.44,-45.217 ; J0.B11 2.4,-40.627 1.905,-40.132 -4.826,-40.132 -5.334,-40.64 -5.334,-44.323 -4.44,-45.217
  Bottom Layer w0.2: v2(-5.461,-47.371) -8.128,-47.371 -8.437,-47.68 -8.437,-60.494 -5.446,-63.485 v1(-5.446,-67.803)
SPI1_MOSI: J0.A10 J0.B10 TVS1.1 U1.12 | length 46.6
  Top Layer w0.2: v1(-6.35,-70.539) U1.12 ; TVS1.1 v2(-2.54,-45.974) -1.75,-45.184 J0.A10
  Bottom Layer w0.2: v1(-6.35,-70.539) -6.35,-63.246 -8.852,-60.744 -8.852,-46.444 -8.382,-45.974 v2(-2.54,-45.974) 1.143,-45.974 1.938,-45.179 1.938,-41.833 1.6,-41.495 J0.B10
SPI1_SCK: J0.A2 J0.B2 TVS2.1 U1.9 | length 68.1
  Top Layer w0.2: v1(-8.11,-66.657) U1.9 ; J0.A2 2.25,-44.795 2.667,-45.212 5.884,-45.212 v2(6.35,-44.746) 7.107,-45.503 TVS2.1
  Bottom Layer w0.2: v1(-8.11,-66.657) -8.11,-62.629 -9.652,-61.087 -9.652,-40.806 -9.144,-40.298 -9.144,-38.862 -8.636,-38.354 -2.54,-38.354 ; J0.B2 -2.4,-40.707 -2.032,-40.339 -2.032,-38.862 -2.54,-38.354 ; v2(6.35,-44.746) 6.35,-39.624 5.08,-38.354 -2.54,-38.354
SPI2_MISO: U1.29
SPI2_MOSI: U1.18
SPI2_SCK: U1.31
UCAP: C3.2 U1.13 | length 2.3
  Top Layer w0.2: C3.2@-6.985,-74.295 -6.604,-74.676 -5.565,-74.676 U1.13
USART2_RXD: U1.27
USART2_TXD: U1.28
USB_D+: R2.2 U2.6 | length 2.7
  Top Layer w0.2: R2.2 0.95,-53.406 U2.6
USB_D-: R1.2 U2.4 | length 2.7
  Top Layer w0.2: R1.2 -0.95,-53.401 U2.4
VBUS: B1.1 J0.A4 J0.A9 J0.B4 J0.B9 U2.5 | length 34.1
  Top Layer w0.254: J0.A9 J0.A9@-1.227,-43.307 ; J0.B4@-1.227,-42.087 J0.B4 ; J0.B9 J0.B9@1.227,-42.087
  Top Layer w0.3: v4(-6.223,-44.704) -6.223,-47.752 -5.334,-48.641 -2.286,-48.641 -1.524,-49.403 -0.381,-49.403 0,-49.784 U2.5 ; J0.A9 J0.B4@-1.25,-42.11 ; J0.A4 J0.B9@1.25,-42.11
  Top Layer w0.508: B1.1 -8.128,-42.799 v4(-6.223,-44.704)
  Bottom Layer w0.4: J0.B4 -1.2,-44.38 -1.905,-45.085 0.381,-45.085 1.2,-44.266 J0.B9
  Bottom Layer w0.508: v4(-6.223,-44.704) -4.191,-44.704 -3.81,-45.085 -1.905,-45.085
VCC_3V3_MCU: C1.2 C2.2 C5.2 C7.2 C8.2 J5.1 U1.15 U1.16 U3.5 | length 41
  Top Layer w0.24: v6(-9.652,-76.327) C1.2 C2.2
  Top Layer w0.254: C2.2 -5.918,-76.022 -5.497,-76.022 U1.15 U1.16
  Top Layer w0.3: C5.2 C5.2@-5.207,-57.658
  Top Layer w0.508: v4(-10.795,-59.69) -6.096,-59.69 -5.461,-59.055 C5.2 C7.2 -7.747,-57.912 -8.255,-57.404 -9.016,-57.404 C8.2 -9.657,-56.763 U3.5 ; C5.2@-5.207,-57.658 J5.1
  Bottom Layer w0.508: v4(-10.795,-59.69) -11.938,-60.833 -11.938,-75.692 -11.303,-76.327 v6(-9.652,-76.327)
VCC_5V: C0.1 C4.2 C6.2 C12.2 C13.1 F1.2 U3.1 U3.3 U4.8 U5.3 U6.8 U7.1 | length 104.6
  Top Layer w0.254: U6.8 3.751,-65.202 3.708,-65.244 3.708,-68.73 ccw(c3.962,-68.729) 3.782,-68.907 6.566,-71.692 ccw(c6.745,-71.511) 6.743,-71.765 U7.1
  Top Layer w0.508: U3.3 -11.557,-51.098 -11.259,-50.8 -10.571,-50.8 C4.2@-10.444,-50.673 ; C0.1 C0.1@-10.16,-47.625 ; F1.2 C0.1@-10.16,-47.625 ; U3.1 -9.657,-50.668 C4.2 C0.1@-10.16,-47.625 ; U3.1@-9.636,-52.513 -8.064,-52.513 C6.2 -7.745,-52.832 v1(-4.693,-52.832) ; U5.3 7.661,-82.718 v3(8.763,-83.82) ; U7.1 C13.1@10.617,-71.765 ; C13.1 11.778,-71.68 11.957,-71.501 v3(12.04,-71.501) C12.2 15.325,-71.501 15.367,-71.543 U4.8@15.367,-71.549
  Bottom Layer w0.508: v1(-4.693,-52.832) 18.459,-52.832 cw(c18.459,-53.34) 18.818,-52.981 19.663,-53.826 cw(c19.304,-54.185) 19.812,-54.185 19.812,-71.501 ; v3(8.763,-83.82) 14.097,-83.82 19.812,-78.105 19.812,-71.501 ; v3(12.04,-71.501) 19.812,-71.501
VSS: B2.1 J0.0@4.13,-41.46 J0.0@-4.13,-41.46 J0.A1 J0.A12 J0.B1 J0.B12 U2.2 | length 32.5
  Top Layer w0.254: J0.B1 -2.773,-42.087 -2.773,-43.307 J0.A12 ; J0.A1 2.773,-43.307 2.773,-42.087 J0.B12
  Top Layer w0.3: U2.2 v7(0,-46.857)
  Top Layer w0.508: v1@-3.434,-39.243 3.556,-39.243 4.13,-39.817 4.13,-41.46 4.13,-41.843 4.764,-42.478 4.764,-43.075 5.124,-43.434 6.858,-43.434 7.493,-44.069 B2.1
  Bottom Layer w0.3: v7(0,-46.857) 0.433,-46.424 2.217,-46.424 2.8,-45.841 J0.B12
  Bottom Layer w0.508: J0.0@-4.13,-41.46 -4.13,-40.071 v1(-3.302,-39.243) ; J0.0@-4.123,-41.515 -3.578,-42.06 J0.B1 ; J0.B12 3.578,-42.06 J0.0@4.123,-41.515
pads on no net: J0.0@4.49,-37.07 J0.0@-4.49,-37.07 J0.A5 J0.A8 J0.B5 J0.B8 U1.1 U1.2 U1.3 U1.4 U1.7 U1.11 U1.23 U1.24 U1.25 U1.26 U1.30 U1.32 U1.39 U1.40 U1.41 U1.42 U1.43 U1.44 U1.45 U1.46 U1.47 U1.48

## Polygon pours and split planes (outlines as drawn)
GND on Bottom Layer "GND_L02_P002" (solid, remove dead copper, pour order 2): -21,-125 -21,-52 -16,-52 -16,-36 16,-36 16,-52 21,-52 21,-129 -13,-129
GND on Top Layer "GND_L01_P003" (solid, remove dead copper, pour order 3): -21,-125 -21,-52 -16,-52 -16,-36 16,-36 16,-52 21,-52 21,-129 -13,-129

## Keep-outs
Keep-Out Layer:
  circle w0.254: c16.87,-101.31 r0.8
  circle w0.254: c16.87,-106.69 r0.8
  circle w0.254: c-3.49,-88.49 r0.8
  circle w0.254: c3.36,-88.49 r0.8
  circle w0.254: c-17,-56 r1.1
  circle w0.254: c17,-56 r1.1
  circle w0.254: c-17,-84.6 r1.1
  circle w0.254: c17,-84.6 r1.1
  circle w0.254: c-17,-122 r1.1
  circle w0.254: c17,-125 r1.1
  circle w0.254: c-13,-39 r1
  circle w0.254: c13,-39 r1
  lines w0.254: -21,-125 -21,-52 -16,-52 -16,-36 16,-36 16,-52 21,-52 21,-129 -13,-129 ; -20.994,-124.981 -12.994,-128.981 ; -13,-117 -13,-91 13,-91 13,-117 -13,-117

## Other copper
Top Layer:
  region net NetR8_1: 5.865,-76.408 10.804,-81.347 13.947,-78.204 9.008,-73.265
  region net NetR8_1: 4.787,-81.616 5.506,-82.335 8.918,-78.922 8.2,-78.204
  pour cut-out: 9.574,-61.957 11.168,-61.957 11.487,-61.957 11.487,-62.381 11.487,-65.779 8.985,-65.779 8.985,-62.394 9.116,-62.262
  pour cut-out: 2.142,-63.208 2.684,-62.665 2.684,-61.171 2.986,-60.87 5.032,-60.87 5.38,-61.219 5.38,-65.375 5.032,-65.724 3.299,-65.724 2.142,-64.566
  pour cut-out: -3.84,-63.238 -3.266,-62.664 -2.38,-62.664 -2.38,-62.705 -1.959,-63.126 -1.959,-63.344 -3.78,-63.344 -3.791,-63.356 -3.84,-63.307
  pour cut-out: 14.329,-61.409 14.783,-61.863 14.783,-66.794 11.54,-66.794 11.54,-61.409 13.292,-61.409
  pour cut-out: 8.382,-69.008 9.89,-69.008 9.89,-69.174 9.798,-69.266 8.49,-69.266 8.382,-69.158
  pour cut-out: -0.824,-44.14 -0.824,-48.049 -1.479,-48.704 -1.899,-48.284 -5.186,-48.284 -5.378,-48.092 -4.911,-47.625 -3.937,-47.625 -3.937,-45.147 -2.824,-44.034 -0.894,-44.034
  pour cut-out: 17.221,-75.738 15.855,-75.738 15.011,-76.581 15.011,-80.645 15.638,-81.272 17.221,-81.272
  pour cut-out: 18.915,-66.81 18.915,-72.307 18.624,-72.598 15.766,-72.598 15.629,-70.096 15.629,-66.81
  pour cut-out: -5.976,-74.982 -5.378,-74.982 -5.362,-74.966 -5.226,-75.101 -5.226,-75.28 -5.947,-76.001 -8.853,-76.001 -9.333,-75.52 -8.972,-75.52 -8.882,-75.43 -7.247,-75.43 -7.239,-75.438 -7.239,-75.184
Bottom Layer:
  pour cut-out: 18.415,-52.324 18.424,-52.333 20.667,-52.333 20.667,-78.325 20.701,-78.359 20.628,-78.432 20.139,-78.432 20.139,-54.302 18.415,-52.578

## Silkscreen, mask and mechanical layers (free items; w line width, h text height)
Top Overlay:
  circle w0.254: c13,-39 r2
  circle w0.254: c-13,-39 r2
  circle w0.254: c17,-125 r2
  circle w0.254: c-17,-122 r2
  circle w0.254: c17,-84.6 r2
  circle w0.254: c-17,-84.6 r2
  circle w0.254: c17,-56 r2
  circle w0.254: c-17,-56 r2
  text "DS135-1.1-A" at -3.277,-121.673 h1.52
Bottom Overlay:
  circle w0.254: c13,-39 r2
  circle w0.254: c-13,-39 r2
  circle w0.254: c17,-125 r2.5
  circle w0.254: c-17,-122 r2.5
  circle w0.254: c17,-84.6 r2.5
  circle w0.254: c-17,-84.6 r2.5
  circle w0.254: c17,-56 r2.5
  circle w0.254: c-17,-56 r2.5
Mechanical 1:
  circle w0.254: c16.87,-106.69 r0.8
  circle w0.254: c16.87,-101.31 r0.8
  circle w0.254: c3.36,-88.49 r0.8
  circle w0.254: c-3.49,-88.49 r0.8
  circle w0.254: c13,-39 r1
  circle w0.254: c-13,-39 r1
  circle w0.254: c17,-125 r1.1
  circle w0.254: c-17,-122 r1.1
  circle w0.254: c17,-84.6 r1.1
  circle w0.254: c-17,-84.6 r1.1
  circle w0.254: c17,-56 r1.1
  circle w0.254: c-17,-56 r1.1
  lines w0.254: -21.006,-124.993 -21.006,-51.994 ; -21.006,-124.993 -12.987,-129.007 21.006,-129.007 21.006,-51.994 16.002,-51.994 16.002,-35.992 -16.002,-35.992 -16.002,-51.994 -21.006,-51.994 ; -21.006,-124.993 -21.006,-51.994 ; -13,-117 13,-117 13,-91 -13,-91 -13,-117

## Text inside footprints (layer, text, board x,y; h text height)
C0: Top Overlay "+" at -9.271,-46.355 h1 r180